# EAGLE board TrainIEEE RAS v.3 (EAGLE 9.7.0)

Size 100 x 80 mm. Coordinates in mm from the lower left corner, seen from the top.
Outline: 0,0 100,0 100,80 0,80 0,0
Copper layers (1*16): Top 0.035mm / dielectric 1.5mm / Bottom 0.035mm
Design rules "default": minimum track width 6mil, minimum drill 0.35mm, track to track 6mil, track to pad 6mil, pad to pad 6mil, via to via 6mil, smd to smd 6mil, copper to edge 40mil, drill to drill 6mil, minimum pad ring 10mil, minimum via ring 8mil, stop-mask expansion 4mil, vias tented up to drill 0mil, thermal gap 10mil

## Footprints (pad centres in the part's own frame; a part is rotated, then mirrored left to right if it is on the bottom)
LED-RGB-5MM = drill 0.9: B 0.635,0.635; C -0.635,-0.635; G 1.905,-0.635; R -1.905,0.635
HC-SR04 = drill 1.016 long: 1 -3.81,0; 2 -1.27,0; 3 1.27,0; 4 3.81,0
PIEZO = drill 1 pad 1.6: 1 -3.5,0; 2 3.5,0
RESAD1016W63L850D250B = drill 0.83 pad 1.43: 1 -5.08,0; 2 5.08,0
ARDUINO-UNO-R3-SHIELD = drill 1.016 pad 1.88: 3.3V 24.13,-2.54; 5V 24.13,0; A0 24.13,12.7; A1 24.13,15.24; A2 24.13,17.78; A3 24.13,20.32; A4 24.13,22.86; A5 24.13,25.4; AREF -24.13,-13.97; D2 -24.13,20.32; D3 -24.13,17.78; D4 -24.13,15.24; D5 -24.13,12.7; D6 -24.13,10.16; D7 -24.13,7.62; D8 -24.13,3.81; D9 -24.13,1.27; D10 -24.13,-1.27; D11 -24.13,-3.81; D12 -24.13,-6.35; D13 -24.13,-8.89; GND@0 24.13,2.54; GND@1 24.13,5.08; GND@2 -24.13,-11.43; IOREF 24.13,-7.62; NC 24.13,-10.16; RES 24.13,-5.08; RX -24.13,25.4; SCL -24.13,-19.05; SDA -24.13,-16.51; TX -24.13,22.86; VIN 24.13,7.62

## Placement (x,y rotation side)
D1  LED-RGBRCBG-PTH  [LED-RGB-5MM]  176.66,31.86 0 top  (outside the outline)
DIST1  DISTANCE-SENSOR-4PINHC-SR04  [HC-SR04]  111.08,80.63 0 top  (outside the outline)
DIST2  DISTANCE-SENSOR-4PINHC-SR04  [HC-SR04]  7.62,38.86 90 top
DIST3  DISTANCE-SENSOR-4PINHC-SR04  [HC-SR04]  251.82,46.11 270 top  (outside the outline)
PIEZO3  PIEZO  [PIEZO]  60.3,16.8 90 top
R2  160  [RESAD1016W63L850D250B]  175.39,47.1 90 top  (outside the outline)
U1  ARDUINO-UNO-R3-SHIELD  [ARDUINO-UNO-R3-SHIELD]  109.87,29.84 270 top

## Library data of the parts
D1 DIST1-DIST3 PIEZO3 R2 U1 = Tinkercad

## Nets
D1_C: D1.C R2.1
U1_5V: DIST1.1 DIST2.1 DIST3.1 U1.5V
U1_D2: D1.R U1.D2
U1_D3: D1.B U1.D3
U1_D4: D1.G U1.D4
U1_D6: DIST3.3 U1.D6
U1_D7: DIST3.2 U1.D7
U1_D8: DIST2.3 U1.D8
U1_D9: DIST2.2 U1.D9
U1_D10: DIST1.3 U1.D10
U1_D11: DIST1.2 U1.D11
U1_D13: PIEZO3.2 U1.D13
U1_GND: DIST1.4 DIST2.4 DIST3.4 PIEZO3.1 R2.2 U1.GND@0 U1.GND@1 U1.GND@2

## Tracks (layer width: path | path; a pad name or v marks a point on that pad's centre or on a via)
D1_C  (1 unrouted)
U1_5V  (3 unrouted)
U1_D2  (1 unrouted)
U1_D3  (1 unrouted)
U1_D4  (1 unrouted)
U1_D6  (1 unrouted)
U1_D7  (1 unrouted)
U1_D8  (1 unrouted)
U1_D9  (1 unrouted)
U1_D10  (1 unrouted)
U1_D11  (1 unrouted)
U1_D13  (1 unrouted)
U1_GND  (7 unrouted)